# Altium PCB PCB.PcbDoc
Units mm, origin at the board's own origin, x right, y up, seen from the top; angles counter-clockwise.
Board outline 20.1 x 9 mm, 2 copper layers (Top Layer, Bottom Layer), stack 0.871 mm thick; 6 components, 6 nets, 22 pads, 4 vias.
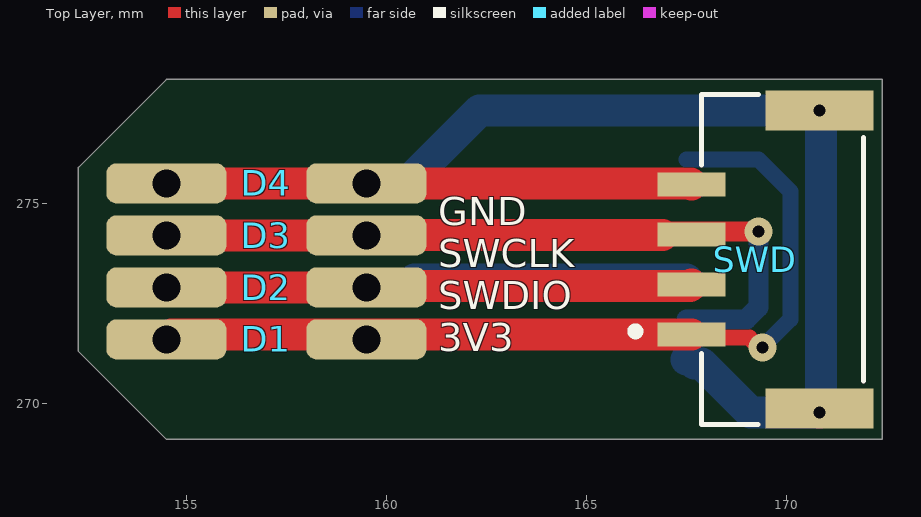
[diagram p0: Top Layer view]
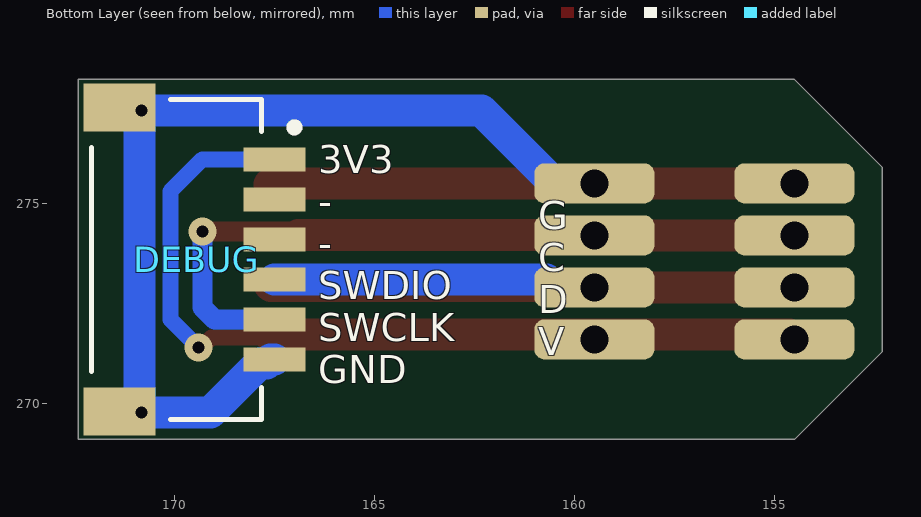
[diagram p1: Bottom Layer view, seen from below]
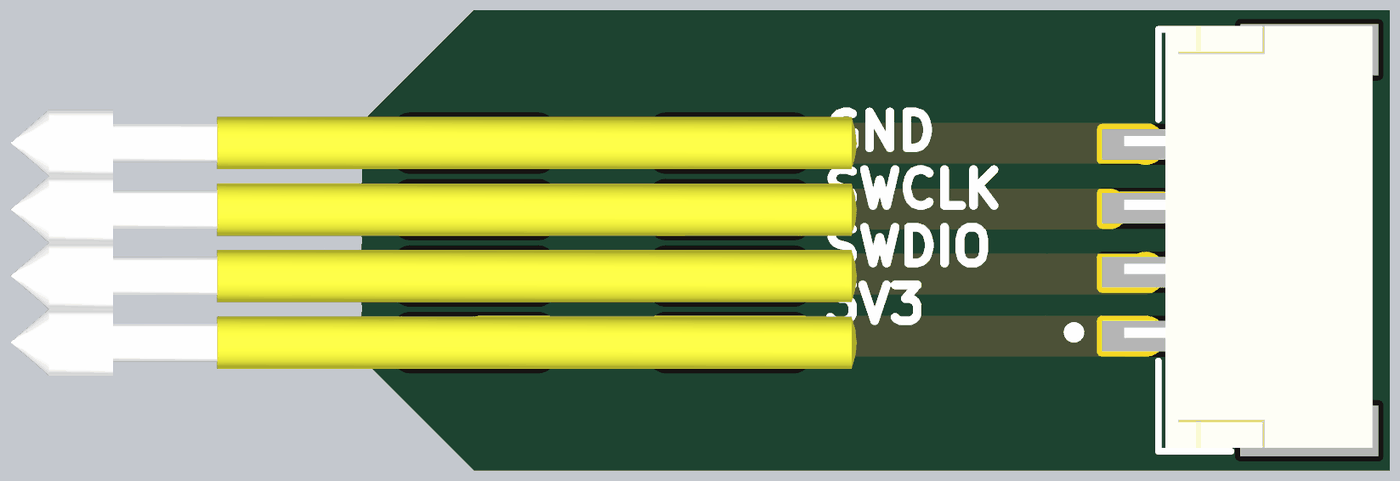
[diagram p2: 3D render of the assembled board from above, using the file's embedded part models]

## Layer stack, top to bottom
Top Solder: solder mask 0.0102, Solder Resist, Dk 3.5
Top Layer: signal copper 0.0356
Dielectric 1: dielectric 0.8, FR-4, Dk 4.8
Bottom Layer: signal copper 0.0356
Bottom Solder: solder mask 0.0102, Solder Resist, Dk 3.5

## Board outline
154.5,269.1 152.3,271.3 152.3,275.9 154.5,278.1 172.4,278.1 172.4,269.1

## Design rules (kind name [scope] priority, off if disabled: settings)
Clearance [All] p1: gap=0.17 ignorepadtopadclearanceinfootprint=FALSE except(-3: SMDPad-Via)
HoleSize [All] p1: absolutevalues=TRUE maxlimit=20 minlimit=0.025 maxpercent=80.000 minpercent=20.000
MinimumSolderMaskSliver [All] p1: minsoldermaskwidth=0.17
PolygonConnect PolygonConnect_1 [InNetClass('direct')] p1: connectstyle=Direct reliefconductorwidth=0.254 reliefentries=4 polygonreliefangle="90 Angle" airgapwidth=0.254
PolygonConnect [All] p2: connectstyle=Direct reliefconductorwidth=0.254 reliefentries=4 polygonreliefangle="90 Angle" airgapwidth=0.254
RoutingVias [All] p1: holewidth=0.3 width=0.7 viastyle="Through Hole" minholewidth=0.3 minwidth=0.7 maxholewidth=20 maxwidth=20
SilkToSilkClearance [All] p1: silktosilkclearance=0
SilkToSolderMaskClearance [IsPad] p1: minsilkscreentomaskgap=0 clearancetoexposedcopper=TRUE
SolderMaskExpansion [All] p1: expansion=0.102 istentingtop=FALSE
Width [All] p1: maxlimit=10 minlimit=0.17 preferedwidth=0.254 minimp=50.000000 maximp=50.000000 favimp=50.000000
26 further rules are at their usual default settings.

## Components (designator, comment, footprint, x,y, rotation, side; value= is the part's Value field where it differs from the comment)
D1 "P75-E2" P75-E2 159.5,271.6 r180 top
D2 "P75-B1" P75-E2 159.5,272.9 r180 top
D3 "P75-B1" P75-E2 159.5,274.2 r180 top
D4 "P75-E2" P75-E2 159.5,275.5 r180 top
DEBUG "SM06B-SRSS-TB(LF)(SN)" JST_SM06B-SRSS-TB(LF)(SN) 167.5,273.6 r270 bottom
SWD "" JST_SM04B-GHS-TB(LF)(SN)- 169.9,273.6 r90 top

## Footprints (in the part's own frame and the unit in brackets; to place one, negate y for a bottom-side part, rotate by r counter-clockwise, add the part's x,y. Pads: shape width x height; smd on the part's side, far side on the other; paste and mask are expansions set on the pad)
JST_SM04B-GHS-TB(LF)(SN)- [mm]
  rect 0.6x1.7 smd: 1(-1.875,2.275) 2(-0.625,2.275) 3(0.625,2.275) 4(1.875,2.275)
  rect 1x2.7 smd: SH1(-3.725,-0.925) SH2(3.725,-0.925)
  silkscreen extent -4.13,-2.02 4.13,3.77, body extent -4.06,-2.16 4.19,2.69, height 4.35
JST_SM06B-SRSS-TB(LF)(SN) [mm]
  rect 0.6x1.55 smd: 1(-2.5,0) 2(-1.5,0) 3(-0.5,0) 4(0.5,0) 5(1.5,0) 6(2.5,0)
  rect 1.2x1.8 smd: S1(-3.8,-3.875) S2(3.8,-3.875)
  silkscreen extent -4,-4.57 4,0.6, body extent -4,-4.51 4,0.44, height 2.95
P75-E2 [mm]
  rrect50% 3x1 hole 0.7: 1(0,0) 1(5,0)
  body extent -2.38,-0.65 14.06,0.65, height 1.25

## Part data
D1 D4: library part "Pogo pin P75-E2", "Pogo pin P75-E2", Instructions="see picture to install", MP=P75-B1, System=Connector
D2 D3: library part "Pogo pin P75-E2", "Pogo pin P75-B1", Instructions="see picture to install", MP=P75-B1, System=Connector
DEBUG: "Connector Header Surface Mount, Right Angle 6 position 0.039 _1.00mm_", Package=None, Digi-Key_Part_Number=455-1806-1-ND, Digi-Key_Purchase_URL=https://www.digikey.com/product-detail/en/jst-sales-america-inc/SM06B-SRSS-TB_LF__SN_/455-1806-1-ND/926877?utm_source=snapeda&utm_medium=aggregator&utm_campaign=symbol, MF="JST Sales", MP=SM06B-SRSS-TB_LF__SN_, SnapEDA_Link=https://www.snapeda.com/parts/SM06B-SRSS-TB%28LF%29%28SN%29/JST%20Sales%20America%20Inc./view-part/554386/?ref=snap, System=Connector
SWD: library part SM04B-GHS-TB(LF)(SN)-, "Connector Header Surface Mount, Right Angle 4 position 0.049 _1.25mm_", Package=None, Availability=Unavailable, ChipDip_Link=https://www.chipdip.ru/product/sm04b-ghs-tb-lf-sn-gh-1.25mm-header-side-ent, HelpURL=http://www.farnell.com/datasheets/2082975.pdf, MF="JST Sales", MP=SM04B-GHS-TB_LF__SN_-, Price=None, SnapEDA_Link=https://www.snapeda.com/parts/SM04B-GHS-TB%28LF%29%28SN%29-/JST%20Sales%20America%20Inc./view-part/2759740/?ref=snap, System=Connector

## Via types
v1: diameter 0.7, hole 0.3, Top Layer to Bottom Layer, tented both sides, 4 vias

## Nets (pads, with @x,y where several pads share a name; then routed paths per layer and width w, separated by ;. In a path a pad name is that pad's centre, name@x,y a point inside that pad or via, vN(x,y) a via of type N, cw(c..) or ccw(c..) an arc to the next point about the centre after c; other vN are vias at no path point)
3v3: D1.1 DEBUG.1 SWD.1 | length 22.2
  Top Layer w0.4: SWD.1 167.706,271.644 169.075,271.644 169.319,271.4 v1(169.4,271.4)
  Top Layer w0.8: D1.1@154.5,271.6 154.625,271.725 SWD.1
  Bottom Layer w0.4: DEBUG.1 169.3,276.1 170.1,275.3 170.1,272.1 v1(169.4,271.4)
DEBUG_RX: DEBUG.3
DEBUG_TX: DEBUG.2
GND: D4.1 DEBUG.6 DEBUG.S1 DEBUG.S2 SWD.4 SWD.SH1 SWD.SH2 | length 36.8
  Top Layer w0.8: D4.1@154.5,275.5 159.5,275.5 167.6,275.5 SWD.4 ; v1(170.825,269.775) SWD.SH1
  Bottom Layer w0.8: D4.1@159.5,275.5 160.5,275.5 162.325,277.325 v1(170.825,277.325) 170.87,277.28 170.87,269.82 v1(170.825,269.775) 169.1,269.775 167.875,271 167.7,271 167.6,271.1 DEBUG.6
SWCLK: D3.1 DEBUG.5 SWD.3 | length 18.7
  Top Layer w0.5: SWD.3@166.9,274.212 166.987,274.3 v1(169.3,274.3)
  Top Layer w0.8: D3.1@154.5,274.2 159.5,274.2 159.513,274.212 SWD.3@166.9,274.212
  Bottom Layer w0.5: DEBUG.5 169,272.1 169.3,272.4 v1(169.3,274.3)
SWDIO: D2.1 DEBUG.4 SWD.2 | length 21.2
  Top Layer w0.8: D2.1@154.5,272.9 159.5,272.9 159.538,272.938 167.588,272.938 SWD.2
  Bottom Layer w0.8: D2.1@159.5,272.9 160.5,272.9 160.7,273.1 DEBUG.4

## Silkscreen, mask and mechanical layers (free items; w line width, h text height)
Top Overlay:
  text "GND / SWCLK / SWDIO / 3V3" at 161.3,271.3 h0.7
Bottom Overlay:
  text "G / C / D / V" at 160.9,271.2 h0.7
  text "3V3 / - / - / SWDIO / SWCLK / GND" at 166.4,270.5 h0.7
Mechanical 2:
  the board outline again, w0.2